# EAGLE board filtro_ar (EAGLE 9.2.2)
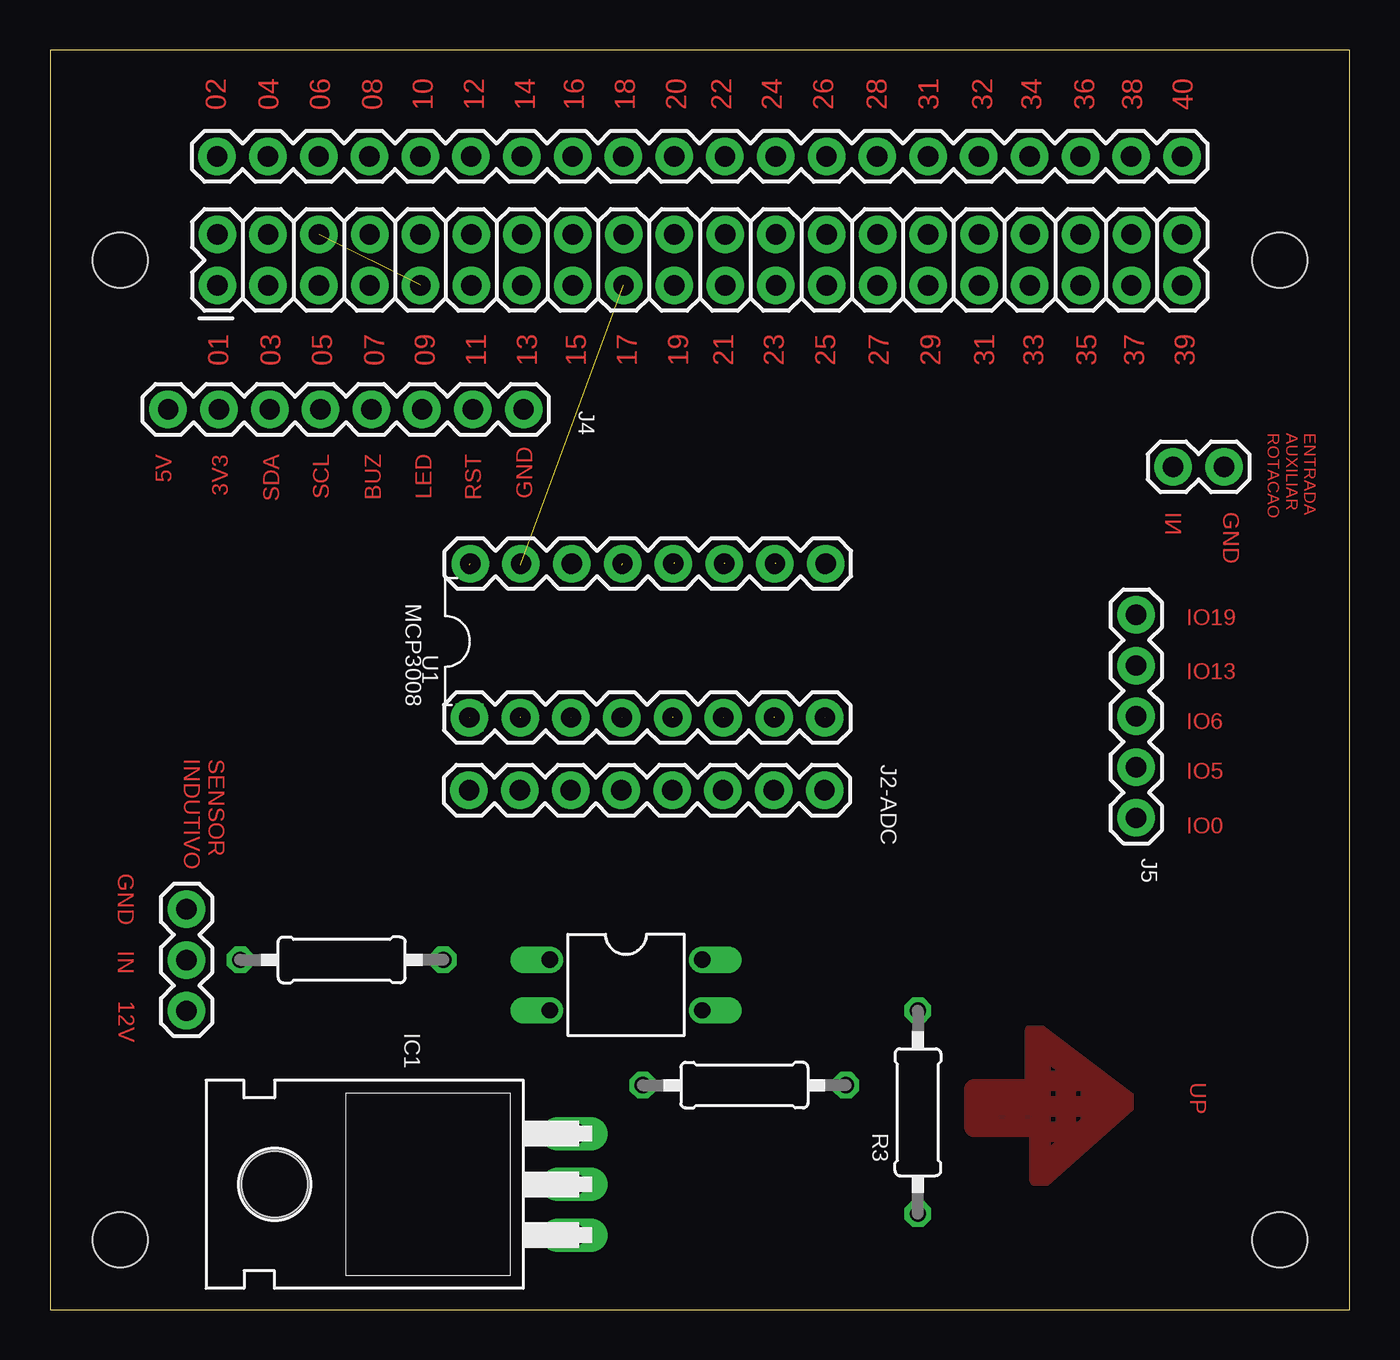
[diagram p0: board, top side]
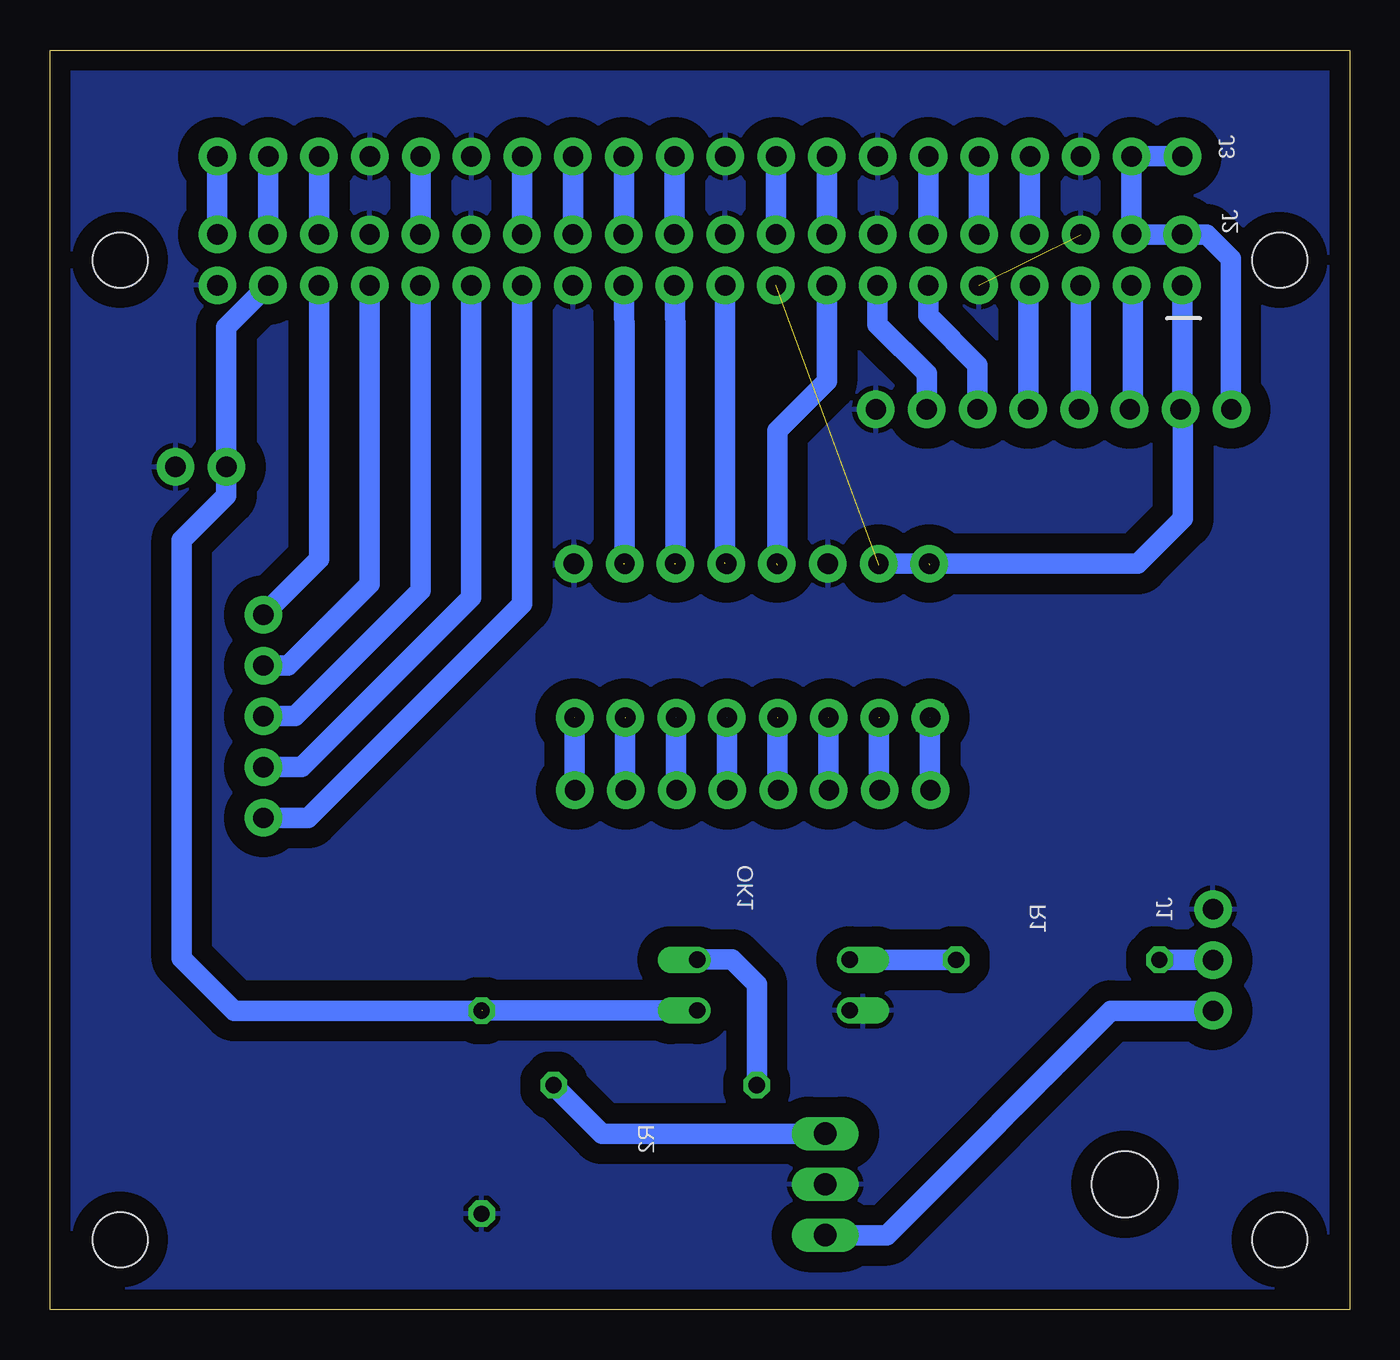
[diagram p1: board, bottom side, seen from below]

Size 65 x 63 mm. Coordinates in mm from the lower left corner, seen from the top.
Outline: 0,0 65,0 65,63 0,63 0,0
Copper layers (1*16): Top 0.035mm / dielectric 1.5mm / Bottom 0.035mm
Design rules "default *": minimum track width 40mil, minimum drill 0.35mm, track to track 40mil, track to pad 40mil, pad to pad 40mil, via to via 40mil, smd to smd 6mil, copper to edge 40mil, drill to drill 6mil, minimum pad ring 10mil, minimum via ring 8mil, stop-mask expansion 4mil, vias tented up to drill 0mil, thermal gap 10mil
Holes 2.75 mm at 3.5,3.5 61.5,3.5 3.5,52.5 61.5,52.5

## Footprints (pad centres in the part's own frame; a part is rotated, then mirrored left to right if it is on the bottom)
TO220H = drill 1.118 long: 1 -2.54,-10.16; 2 0,-10.16; 3 2.54,-10.16 | hole 3.302: 0,4.826
1X03 = drill 1.016 pad 1.88: 1 0,0; 2 2.54,0; 3 5.08,0
2X20 = drill 1.016 pad 1.88: 1 0,0; 2 0,2.54; 3 2.54,0; 4 2.54,2.54; 5 5.08,0; 6 5.08,2.54; 7 7.62,0; 8 7.62,2.54; 9 10.16,0; 10 10.16,2.54; 11 12.7,0; 12 12.7,2.54; 13 15.24,0; 14 15.24,2.54; 15 17.78,0; 16 17.78,2.54; 17 20.32,0; 18 20.32,2.54; 19 22.86,0; 20 22.86,2.54; 21 25.4,0; 22 25.4,2.54; 23 27.94,0; 24 27.94,2.54; 25 30.48,0; 26 30.48,2.54; 27 33.02,0; 28 33.02,2.54; 29 35.56,0; 30 35.56,2.54; 31 38.1,0; 32 38.1,2.54; 33 40.64,0; 34 40.64,2.54; 35 43.18,0; 36 43.18,2.54; 37 45.72,0; 38 45.72,2.54; 39 48.26,0; 40 48.26,2.54
1X08 = drill 1.016 pad 1.88: 1 0,0; 2 2.54,0; 3 5.08,0; 4 7.62,0; 5 10.16,0; 6 12.7,0; 7 15.24,0; 8 17.78,0
1X20 = drill 1.016 pad 1.88: 1 0,0; 2 2.54,0; 3 5.08,0; 4 7.62,0; 5 10.16,0; 6 12.7,0; 7 15.24,0; 8 17.78,0; 9 20.32,0; 10 22.86,0; 11 25.4,0; 12 27.94,0; 13 30.48,0; 14 33.02,0; 15 35.56,0; 16 38.1,0; 17 40.64,0; 18 43.18,0; 19 45.72,0; 20 48.26,0
1X02 = drill 1.016 pad 1.88: 1 0,0; 2 2.54,0
1X05 = drill 1.016 pad 1.88: 1 0,0; 2 2.54,0; 3 5.08,0; 4 7.62,0; 5 10.16,0
DIL04 = drill 0.813 offset: 1 -1.27,-3.81; 2 1.27,-3.81; 3 1.27,3.81; 4 -1.27,3.81
0207/10 = drill 0.813 octagon: 1 -5.08,0; 2 5.08,0
DIP16-2.54-19.2X7.62MM = drill 0.9 pad 1.4 square: 1 -8.89,-3.81 | drill 0.9 pad 1.4: 2 -6.35,-3.81; 3 -3.81,-3.81; 4 -1.27,-3.81; 5 1.27,-3.81; 6 3.81,-3.81; 7 6.35,-3.81; 8 8.89,-3.81; 9 8.89,3.81; 10 6.35,3.81; 11 3.81,3.81; 12 1.27,3.81; 13 -1.27,3.81; 14 -3.81,3.81; 15 -6.35,3.81; 16 -8.89,3.81

## Placement (x,y rotation side)
IC1  7805T  [TO220H]  16.06,6.26 90 top
J1  455-1750-1-ND  [1X03]  6.83,20.02 270 top
J2  RASPBERRYPI-40-PIN-GPIO_PTH_NO_SHROUD  [2X20]  8.37,51.23 0 top
J2-ADC  [1X08]  20.96,25.97 0 top
J3  [1X20]  8.36,57.68 0 top
J3-ROT_INPUT  [1X02]  56.18,42.15 0 top
J4  [1X08]  23.69,45.02 180 top
J5  [1X05]  54.33,24.59 90 top
MCP3008  [1X08]  38.8,37.31 180 top
MCP_1A8  [1X08]  20.98,29.61 0 top
OK1  PC817  [DIL04]  28.81,16.23 270 top
R1  1k  [0207/10]  14.59,17.49 0 top
R2  10k  [0207/10]  34.73,11.22 180 top
R3  22k  [0207/10]  43.41,9.87 270 top
U1  MCU-MCP3008-I/P(DIP16-7.62MM)  [DIP16-2.54-19.2X7.62MM]  29.88,33.42 0 top

## Library data of the parts
IC1 = linear
J1 = SparkFun-Connectors; PROD_ID: XXX-00000
J2 J3 J3-ROT_INPUT J5 = SparkFun-Connectors
J2-ADC J4 MCP3008 MCP_1A8 = SparkFun-Connectors; PROD_ID: CONN-08438
OK1 = optocoupler; MPN: PC817X4J000F; OC_FARNELL: 9707727; OC_NEWARK: 97K7059
R1-R3 = rcl; SPICEPREFIX: R
U1 = MCU-MCP3008-I_P_DIP16-7.62MM_; AVAILABILITY: Unavailable; DESCRIPTION: 8 Channel SPI Serial Interface 2.7 V 10-Bit A/D Converter Through Hole - PDIP-16; MF: Microchip; MP: MCP3008-I/P; PACKAGE: DIP-16 Microchip; PRICE: None

## Nets
3V3: J2.1 J2.17 J4.7 MCP3008.7 MCP3008.8 U1.15 U1.16
5V: J2.2 J2.4 J3.1 J3.2 J4.8
12V: IC1.1 J1.3
BUZZER: J2.7 J4.4
GND: IC1.2 J1.1 J2.6 J2.9 J2.14 J2.20 J2.25 J2.30 J2.34 J2.39 J3-ROT_INPUT.2 J3.3 J3.7 J3.10 J3.15 J3.17 J4.1 MCP3008.1 MCP3008.6 OK1.2 R3.2 U1.9 U1.14
GPIO26: J2.37 J3-ROT_INPUT.1 OK1.3 R3.1
LED: J2.11 J4.3
N$1: J2.23 MCP3008.2 U1.10
N$2: OK1.1 R1.2
N$3: J2.21 MCP3008.3 U1.11
N$4: J2.5 J4.5
N$5: J2.19 MCP3008.4 U1.12
N$6: OK1.4 R2.2
N$7: J2.32 J3.16
N$8: J1.2 R1.1
N$9: IC1.3 R2.1
N$10: J2.8 J3.4
N$11: J2.10 J3.5
N$12: J2.12 J3.6
N$13: J2.16 J3.8
N$14: J2.18 J3.9
N$15: J2.24 J3.12
N$16: J2.15 MCP3008.5 U1.13
N$17: J2-ADC.1 MCP_1A8.1 U1.1
N$18: J2-ADC.2 MCP_1A8.2 U1.2
N$19: J2-ADC.3 MCP_1A8.3 U1.3
N$20: J2-ADC.4 MCP_1A8.4 U1.4
N$21: J2-ADC.5 MCP_1A8.5 U1.5
N$22: J2-ADC.6 MCP_1A8.6 U1.6
N$23: J2-ADC.7 MCP_1A8.7 U1.7
N$24: J2-ADC.8 MCP_1A8.8 U1.8
N$25: J2.22 J3.11
N$26: J2.26 J3.13
N$27: J2.28 J3.14
N$28: J2.35 J5.5
N$29: J2.27 J5.1
N$30: J2.36 J3.18
N$31: J2.38 J3.19
N$32: J2.40 J3.20
N$33: J2.29 J5.2
N$35: J2.3 J4.6
N$36: J2.31 J5.3
N$37: J2.33 J5.4
RESET: J2.13 J4.2

## Tracks (layer width: path | path; a pad name or v marks a point on that pad's centre or on a via)
3V3  (3 unrouted)
  Bottom 1.016: MCP3008.7 MCP3008.8 10.58,37.31 8.33,39.56 8.33,44.9 J4.7 | J4.7 8.48,45.05 | J2.1 8.35,45.12 J4.7
5V
  Bottom 1.016: J4.8 5.94,45.05 5.94,52.57 7.14,53.77 J2.2 J2.4 J3.2 J3.1
12V
  Bottom 1.016: IC1.1 23.15,3.72 11.93,14.94 J1.3
AB
  pour Top (hatched): 49.26,13.88 49.26,11.02 46.23,11.02 46.23,9.15 49.49,9.15 49.49,6.57 49.59,6.57 53.88,10.38
BUZZER
  Bottom 1.016: J2.7 16.07,51.15 J4.4
GND  (1 unrouted)
  pour Bottom: 0,80 0,0 65,0 65,80
GPIO26  (1 unrouted)
  Bottom 1.016: J2.37 56.18,49.14 J3-ROT_INPUT.1 56.18,40.72 58.41,38.49 58.41,17.57 55.79,14.95 R3.1 | OK1.3 R3.1
LED
  Bottom 1.016: J4.3 18.61,47.25 21.07,49.71 J2.11
N$1  (1 unrouted)
  Bottom 1.016: 36.31,37.31 U1.10 | MCP3008.2 36.26,48.88 J2.23
N$2
  Bottom 1.016: R1.2 OK1.1
N$3  (1 unrouted)
  Bottom 1.016: 33.77,37.31 U1.11 | MCP3008.3 33.72,48.88 J2.21
N$4
  Bottom 1.016: 13.56,45.05 J4.5 13.43,45.12 J2.5
N$5  (1 unrouted)
  Bottom 1.016: 31.23,37.31 U1.12 | MCP3008.4 31.23,37.36 J2.19
N$6
  Bottom 1.016: R2.2 29.65,16.27 30.89,17.51 OK1.4
N$7
  Bottom 1.016: J3.16 J2.32
N$8
  Bottom 1.016: J1.2 R1.1
N$9
  Bottom 1.016: R2.1 37.39,8.8 IC1.3
N$10
  Bottom 1.016: J3.4 J2.8
N$11
  Bottom 1.016: J2.10 J3.5
N$12
  Bottom 1.016: J3.6 J2.12
N$13
  Bottom 1.016: J3.8 J2.16
N$14
  Bottom 1.016: J3.9 J2.18
N$15
  Bottom 1.016: J3.12 J2.24
N$16  (1 unrouted)
  Bottom 1.016: U1.13 28.61,43.97 26.15,46.43 J2.15
N$17  (1 unrouted)
  Bottom 1.016: MCP_1A8.1 20.98,25.99 J2-ADC.1
N$18  (1 unrouted)
  Bottom 1.016: U1.2 23.53,26 J2-ADC.2
N$19  (1 unrouted)
  Bottom 1.016: U1.3 26.07,26 J2-ADC.3
N$20  (1 unrouted)
  Bottom 1.016: U1.4 28.61,26 J2-ADC.4
N$21  (1 unrouted)
  Bottom 1.016: U1.5 31.15,26 J2-ADC.5
N$22  (1 unrouted)
  Bottom 1.016: U1.6 33.69,26 J2-ADC.6
N$23  (1 unrouted)
  Bottom 1.016: U1.7 36.23,26 J2-ADC.7
N$24  (1 unrouted)
  Bottom 1.016: U1.8 38.77,26 J2-ADC.8
N$25
  Bottom 1.016: J3.11 J2.22
N$26
  Bottom 1.016: J2.26 J3.13
N$27
  Bottom 1.016: J2.28 J3.14
N$28
  Bottom 1.016: J5.5 51.55,37.53 J2.35
N$29
  Bottom 1.016: J2.27 41.39,35.28 52.09,24.59 J5.1
N$30
  Bottom 1.016: J3.18 J2.36
N$31
  Bottom 1.016: J3.19 J2.38
N$32
  Bottom 1.016: J2.40 J3.20
N$33
  Bottom 1.016: J2.29 43.93,35.62 52.42,27.13 J5.2
N$35
  Bottom 1.016: J4.6 10.84,45.17 10.84,51.23 J2.3
N$36
  Bottom 1.016: J2.31 46.47,35.95 52.75,29.68 J5.3
N$37
  Bottom 1.016: J2.33 49.01,36.29 53.08,32.22 J5.4
RESET
  Bottom 1.016: J4.2 21.15,46.81 23.61,49.27 J2.13

## Text on the board
Top: 02 | 04 | 06 | 08 | 10 | 12 | 14 | 16 | 18 | 20 | 22 | 24 | 26 | 28 | 31 | 32 | 34 | 36 | 38 | 40 | 01 | 03 | 05 | 07 | 09 | 11 | 13 | 15 | 17 | 19 | 21 | 23 | 25 | 27 | 29 | 31 | 33 | 35 | 37 | 39 | ENTRADA / AUXILIAR / ROTACAO | 5V | 3V3 | SDA | SCL | BUZ | LED | RST | GND | IN | GND | IO19 | IO13 | IO6 | SENSOR / INDUTIVO | IO5 | IO0 | GND | IN | 12V | UP